# EAGLE board mano_rev_1_0 (EAGLE 9.2.2)
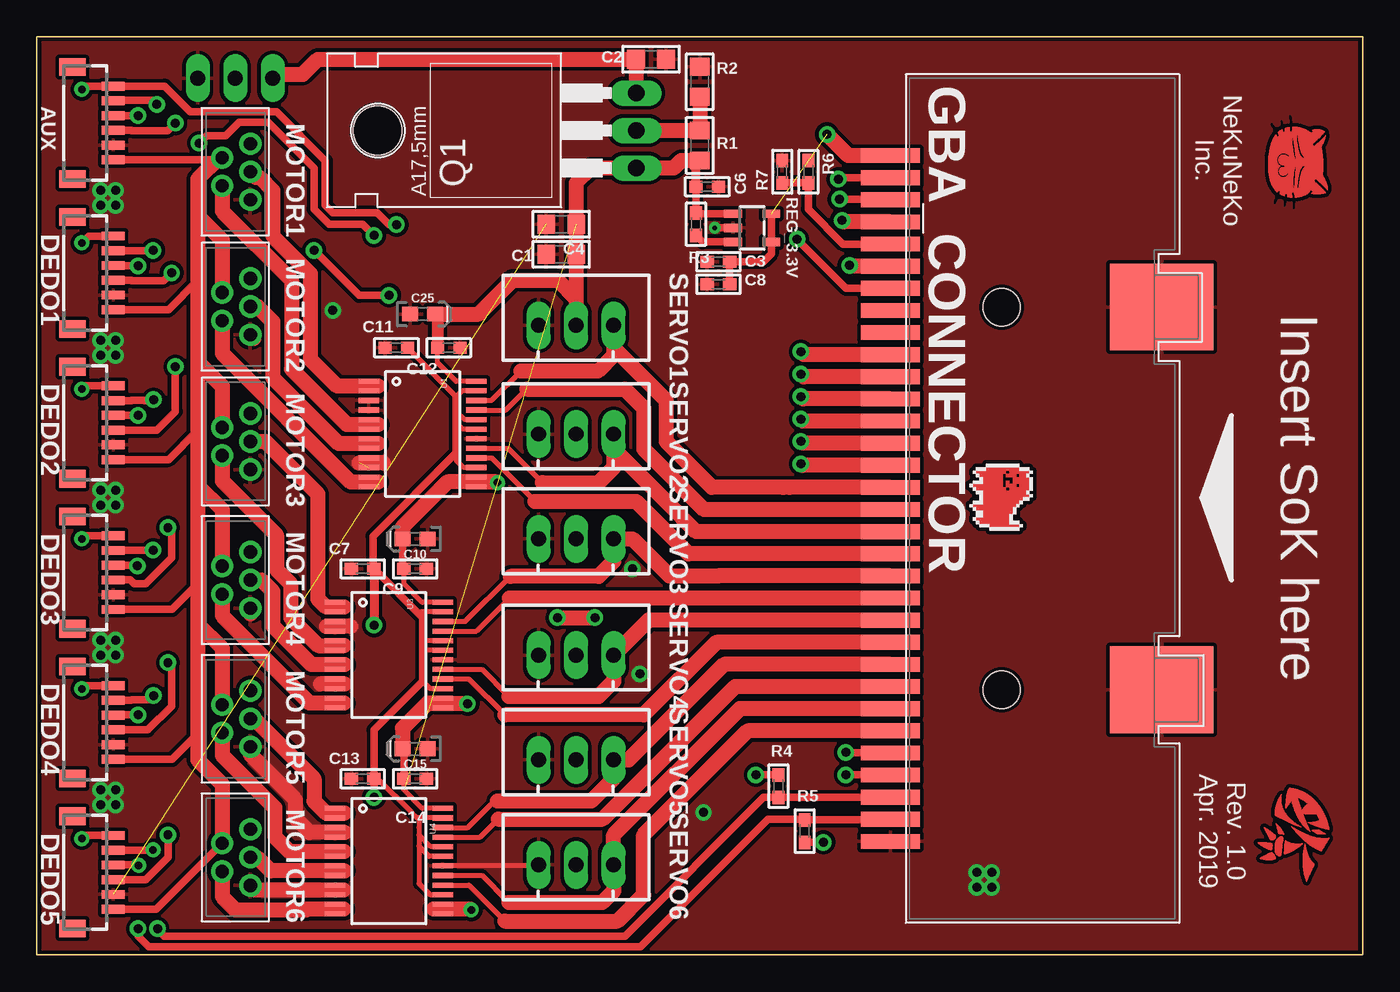
[diagram p0: board, top side]
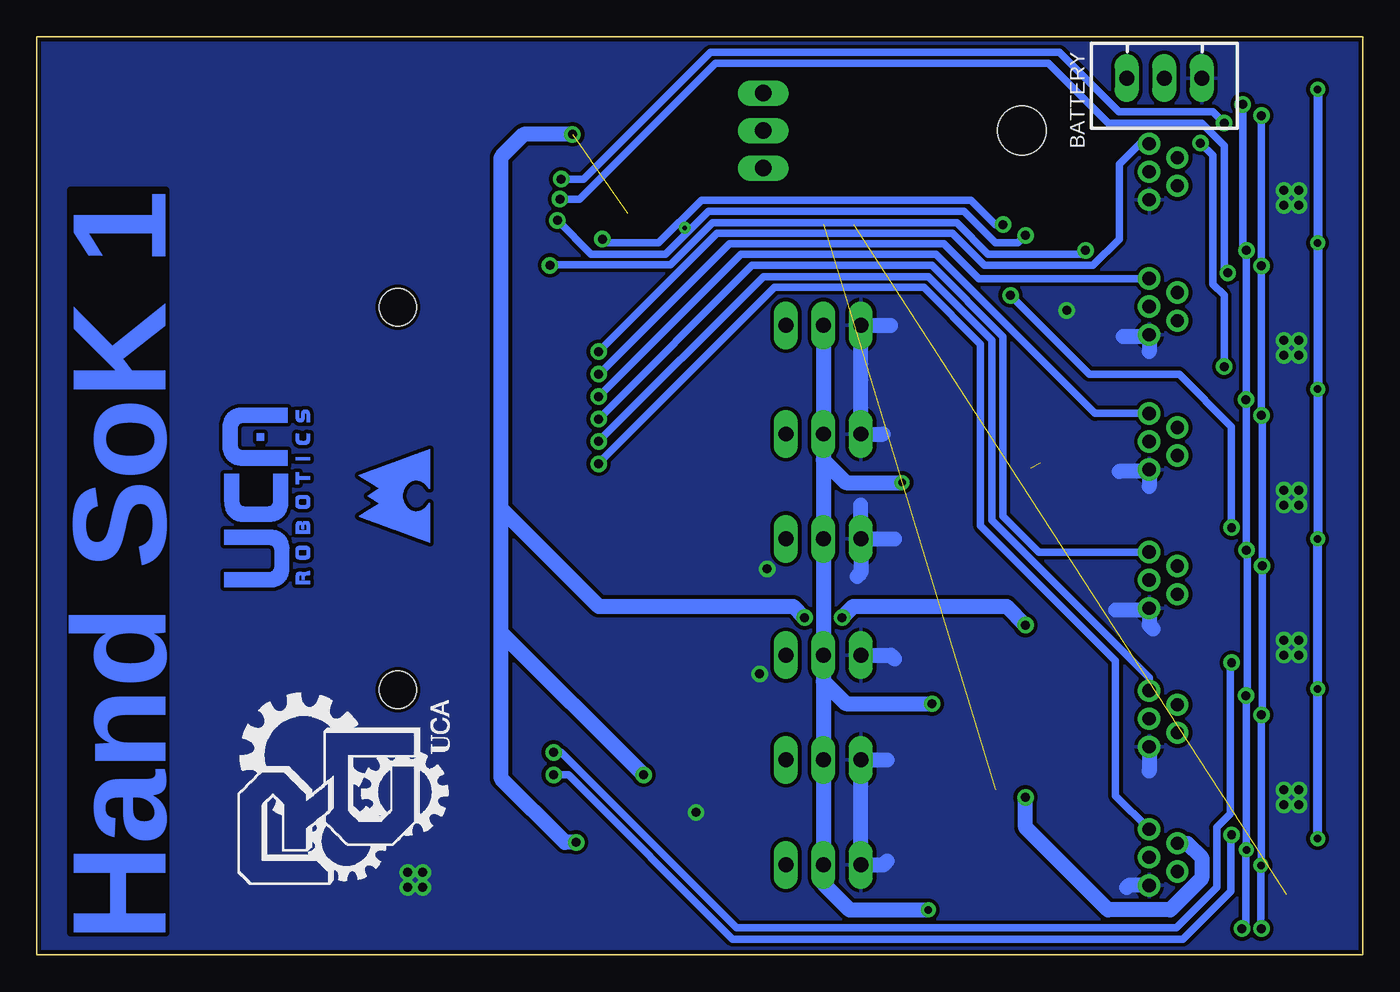
[diagram p1: board, bottom side, seen from below]

Size 89.92 x 62.23 mm. Coordinates in mm from the lower left corner, seen from the top.
Outline: 10.41,0 89.92,0 89.92,62.23 0,62.23 0,0 10.41,0
Copper layers (1*16): Top 0.035mm / dielectric 1.5mm / Bottom 0.035mm
Design rules "SparkFun": minimum track width 8mil, minimum drill 20mil, track to track 8mil, track to pad 8mil, pad to pad 8mil, via to via 8mil, smd to smd 8mil, copper to edge 10mil, drill to drill 8mil, minimum pad ring 12mil, minimum via ring 10mil, stop-mask expansion 4mil, vias tented up to drill 25mil, thermal gap 10mil
Net classes: 2 gnd: width 0.254 mm, drill 0.61 mm, clearance 0.254 mm

## Footprints (pad centres in the part's own frame; a part is rotated, then mirrored left to right if it is on the bottom)
BM06B-SRSS-TB = smd 0.6 x 1.55: 1 -2.5,-1.875; 2 -1.5,-1.875; 3 -0.5,-1.875; 4 0.5,-1.875; 5 1.5,-1.875; 6 2.5,-1.875 | smd 1.2 x 1.8: FIT@1 3.8,0.9; FIT@2 -3.8,0.9
JST-XH-03-PACKAGE-LONG-PAD = drill 1.016 long: 1 -2.54,0; 2 0,0; 3 2.54,0
_0805 = smd 1.2 x 1.3: 1 -1.016,0; 2 1.016,0
_0603 = smd 0.9 x 0.8: 1 -0.762,0; 2 0.762,0
0603-POLAR = smd 1.1 x 1: + 0.85,0; - -0.85,0
GBA_CARTRIDGE = smd 1 x 4: P$1 5.25,-1.3; P$2 6.75,-1.3; P$3 8.25,-1.3; P$4 9.75,-1.3; P$5 11.25,-1.3; P$6 12.75,-1.3; P$7 14.25,-1.3; P$8 15.75,-1.3; P$9 17.25,-1.3; P$10 18.75,-1.3; P$11 20.25,-1.3; P$12 21.75,-1.3; P$13 23.25,-1.3; P$14 24.75,-1.3; P$15 26.25,-1.3; P$16 27.75,-1.3; P$17 29.25,-1.3; P$18 30.75,-1.3; P$19 32.25,-1.3; P$20 33.75,-1.3; P$21 35.25,-1.3; P$22 36.75,-1.3; P$23 38.25,-1.3; P$24 39.75,-1.3; P$25 41.25,-1.3; P$26 42.75,-1.3; P$27 44.25,-1.3; P$28 45.75,-1.3; P$29 47.25,-1.3; P$30 48.75,-1.3; P$31 50.25,-1.3; P$32 51.75,-1.3 | smd 5.88 x 7: P$33 15.525,17.1; P$34 41.475,17.1 | hole 2.54: 15.525,6.25; 41.475,6.25
5PIN = drill 0.9: 1 -1.905,0; 2 -0.953,1.905; 3 0,0; 4 0.953,1.905; 5 1.905,0
TO220 = drill 1.118 long: 1 -2.54,-6.35; 2 0,-6.35; 3 2.54,-6.35 | hole 3.302: 0,11.176
SOT23-5 = smd 0.55 x 1.2: 1 -0.95,-1.3; 2 0,-1.3; 3 0.95,-1.3; 4 0.95,1.3; 5 -0.95,1.3
SSOP24 = smd 0.348 x 1.397: 1 -3.575,-3.656; 2 -2.925,-3.656; 3 -2.275,-3.656; 4 -1.625,-3.656; 5 -0.975,-3.656; 6 -0.325,-3.656; 7 0.325,-3.656; 8 0.975,-3.656; 9 1.625,-3.656; 10 2.275,-3.656; 11 2.925,-3.656; 12 3.575,-3.656; 13 3.575,3.656; 14 2.925,3.656; 15 2.275,3.656; 16 1.625,3.656; 17 0.975,3.656; 18 0.325,3.656; 19 -0.325,3.656; 20 -0.975,3.656; 21 -1.625,3.656; 22 -2.275,3.656; 23 -2.925,3.656; 24 -3.575,3.656

## Placement (x,y rotation side)
AUX  FINGER_5  [BM06B-SRSS-TB]  3.3,56.39 90 top
BATTERY  JST-XH-03-PIN-LONG-PAD  [JST-XH-03-PACKAGE-LONG-PAD]  13.46,59.44 180 bottom
C1  10uF  [_0805]  35.56,47.5 180 top
C2  10uF  [_0805]  41.66,60.71 0 top
C3  1uF  [_0603]  46.23,46.99 180 top
C4  0.1uF  [_0805]  35.56,49.53 180 top
C6  10uF  [_0603]  45.47,52.07 0 top
C7  0.1uF  [_0603]  22.1,26.16 180 top
C8  10uF  [_0603]  46.23,45.47 180 top
C9  0.1uF  [_0603]  25.65,26.16 180 top
C10  10uF  [0603-POLAR]  25.65,28.19 180 top
C11  0.1uF  [_0603]  24.38,41.15 180 top
C12  0.1uF  [_0603]  27.94,41.15 180 top
C13  0.1uF  [_0603]  22.1,11.94 180 top
C14  0.1uF  [_0603]  25.65,11.94 180 top
C15  10uF  [0603-POLAR]  25.65,13.97 180 top
C25  10uF  [0603-POLAR]  26.16,43.43 0 top
DEDO1  FINGER_1  [BM06B-SRSS-TB]  3.3,46.23 90 top
DEDO2  FINGER_2  [BM06B-SRSS-TB]  3.3,36.07 90 top
DEDO3  FINGER_3  [BM06B-SRSS-TB]  3.3,25.91 90 top
DEDO4  FINGER_4  [BM06B-SRSS-TB]  3.3,15.75 90 top
DEDO5  FINGER_5  [BM06B-SRSS-TB]  3.3,5.59 90 top
GBA_CONNECTOR  [GBA_CARTRIDGE]  59.18,59.44 270 top
MOTOR1  MOTOR1  [5PIN]  14.48,53.09 90 top
MOTOR2  MOTOR2  [5PIN]  14.48,43.94 90 top
MOTOR3  MOTOR3  [5PIN]  14.48,34.8 90 top
MOTOR4  MOTOR4  [5PIN]  14.48,25.4 90 top
MOTOR5  MOTOR5  [5PIN]  14.48,16 90 top
MOTOR6  MOTOR6  [5PIN]  14.48,6.6 90 top
Q1  LM338T  [TO220]  34.29,55.88 90 top
R1  270  [_0805]  44.96,54.86 270 top
R2  820  [_0805]  44.96,59.18 270 top
R3  100k  [_0603]  44.7,49.53 270 top
R4  4.7k  [_0603]  50.29,11.43 270 top
R5  4.7k  [_0603]  52.07,8.38 90 top
R6  4.7k  [_0603]  52.32,53.09 270 top
R7  4.7k  [_0603]  50.55,53.09 90 top
REG_3.3V  AP2112-3.3  [SOT23-5]  48.51,49.28 270 top
SERVO1  JST-XH-03-PIN-LONG-PAD  [JST-XH-03-PACKAGE-LONG-PAD]  36.58,42.67 0 top
SERVO2  JST-XH-03-PIN-LONG-PAD  [JST-XH-03-PACKAGE-LONG-PAD]  36.58,35.31 0 top
SERVO3  JST-XH-03-PIN-LONG-PAD  [JST-XH-03-PACKAGE-LONG-PAD]  36.58,28.19 0 top
SERVO4  JST-XH-03-PIN-LONG-PAD  [JST-XH-03-PACKAGE-LONG-PAD]  36.58,20.32 0 top
SERVO5  JST-XH-03-PIN-LONG-PAD  [JST-XH-03-PACKAGE-LONG-PAD]  36.58,13.21 0 top
SERVO6  JST-XH-03-PIN-LONG-PAD  [JST-XH-03-PACKAGE-LONG-PAD]  36.58,6.1 0 top
U1  TB6621FNG  [SSOP24]  26.16,35.31 270 top
U3  TB6621FNG  [SSOP24]  23.88,20.32 270 top
U4  TB6621FNG  [SSOP24]  23.88,6.35 270 top
U$6  [DOG2]  63.25,33.27 270 top
U$7  [SOK_FINISH]  82.55,11.43 270 top
U$8  [NEKO_FINISH]  83.31,56.9 270 top
U$9  [MAGMA]  63.25,27.94 90 bottom
U$14  [UCAROBOTICS]  71.12,24.64 90 bottom
U$16  [GIRA]  61.72,4.57 90 bottom

## Library data of the parts
AUX DEDO1-DEDO5 = con-jst
BATTERY SERVO1-SERVO6 = JST XH Connectors v1-0
C1-C4 C6-C9 C11-C14 R1-R7 REG_3.3V = microbuilder
C10 C15 C25 = SparkFun-Capacitors; MPN: F981A106MMA; PROD_ID: CAP-13210
GBA_CONNECTOR MOTOR1-MOTOR6 Q1 = 0SoK
U1 U3 U4 = SparkFun
U$6-U$9 U$14 U$16 = 0Logos

## Nets
3.3V: AUX.1 C3.1 C7.1 C8.1 C11.1 C13.1 DEDO1.1 DEDO2.1 DEDO3.1 DEDO4.1 DEDO5.1 GBA_CONNECTOR.P$1 MOTOR1.4 MOTOR2.4 MOTOR3.4 MOTOR4.4 MOTOR5.4 MOTOR6.4 R4.1 R5.1 R6.1 REG_3.3V.4 REG_3.3V.5 U1.15 U1.19 U1.20 U1.23 U3.15 U3.19 U3.20 U3.23 U4.15 U4.19 U4.20 U4.23
5.0V: C1.1 C4.1 C6.1 C9.2 C10.+ C12.2 C14.2 C15.+ C25.+ Q1.1 R1.2 R3.1 REG_3.3V.1 SERVO1.2 SERVO2.2 SERVO3.2 SERVO4.2 SERVO5.2 SERVO6.2 U1.13 U1.14 U1.24 U3.13 U3.14 U3.24 U4.13 U4.14 U4.24
AUX_INT: AUX.3 GBA_CONNECTOR.P$2
EN: R3.2 REG_3.3V.3
FINGER_!RESET: AUX.6 DEDO1.6 DEDO2.6 DEDO3.6 DEDO4.6 DEDO5.6 GBA_CONNECTOR.P$7
FINGER_INT1: DEDO1.3 GBA_CONNECTOR.P$3
FINGER_INT2: DEDO2.3 GBA_CONNECTOR.P$4
FINGER_INT3: DEDO3.3 GBA_CONNECTOR.P$6
FINGER_INT4: DEDO4.3 GBA_CONNECTOR.P$28
FINGER_INT5: DEDO5.3 GBA_CONNECTOR.P$29
GND [gnd]: AUX.2 BATTERY.1 C1.2 C2.2 C3.2 C4.2 C6.2 C7.2 C8.2 C9.1 C10.- C11.2 C12.1 C13.2 C14.1 C15.- C25.- DEDO1.2 DEDO2.2 DEDO3.2 DEDO4.2 DEDO5.2 GBA_CONNECTOR.P$32 GBA_CONNECTOR.P$33 GBA_CONNECTOR.P$34 MOTOR1.1 MOTOR2.1 MOTOR3.1 MOTOR4.1 MOTOR5.1 MOTOR6.1 R2.1 R7.2 REG_3.3V.2 SERVO1.1 SERVO2.1 SERVO3.1 SERVO4.1 SERVO5.1 SERVO6.1 U1.3 U1.4 U1.9 U1.10 U1.18 U3.3 U3.4 U3.9 U3.10 U3.18 U4.3 U4.4 U4.9 U4.10 U4.18
MT1_POT: GBA_CONNECTOR.P$10 MOTOR1.5
MT1A: MOTOR1.2 U1.5 U1.6
MT1B: MOTOR1.3 U1.1 U1.2
MT2_POT: GBA_CONNECTOR.P$11 MOTOR2.5
MT2A: MOTOR2.2 U1.11 U1.12
MT2B: MOTOR2.3 U1.7 U1.8
MT3_POT: GBA_CONNECTOR.P$12 MOTOR3.5
MT3A: MOTOR3.2 U3.5 U3.6
MT3B: MOTOR3.3 U3.1 U3.2
MT4_POT: GBA_CONNECTOR.P$13 MOTOR4.5
MT4A: MOTOR4.2 U3.11 U3.12
MT4B: MOTOR4.3 U3.7 U3.8
MT5_POT: GBA_CONNECTOR.P$14 MOTOR5.5
MT5A: MOTOR5.2 U4.5 U4.6
MT5B: MOTOR5.3 U4.1 U4.2
MT6_POT: GBA_CONNECTOR.P$15 MOTOR6.5
MT6A: MOTOR6.2 U4.11 U4.12
MT6B: MOTOR6.3 U4.7 U4.8
N$1: Q1.2 R1.1 R2.2
PWM_MT1A: GBA_CONNECTOR.P$17 U1.21
PWM_MT1B_SERVO1: GBA_CONNECTOR.P$16 SERVO1.3 U1.22
PWM_MT2A_SERVO2: GBA_CONNECTOR.P$18 SERVO2.3 U1.17
PWM_MT2B: GBA_CONNECTOR.P$19 U1.16
PWM_MT3A: GBA_CONNECTOR.P$21 U3.21
PWM_MT3B_SERVO3: GBA_CONNECTOR.P$20 SERVO3.3 U3.22
PWM_MT4A_SERVO4: GBA_CONNECTOR.P$22 SERVO4.3 U3.17
PWM_MT4B: GBA_CONNECTOR.P$23 U3.16
PWM_MT5A: GBA_CONNECTOR.P$25 U4.21
PWM_MT5B_SERVO5: GBA_CONNECTOR.P$24 SERVO5.3 U4.22
PWM_MT6A_SERVO6: GBA_CONNECTOR.P$26 SERVO6.3 U4.17
PWM_MT6B: GBA_CONNECTOR.P$27 U4.16
SCL: AUX.4 DEDO1.4 DEDO2.4 DEDO3.4 DEDO4.4 DEDO5.4 GBA_CONNECTOR.P$31 R5.2
SDA: AUX.5 DEDO1.5 DEDO2.5 DEDO3.5 DEDO4.5 DEDO5.5 GBA_CONNECTOR.P$30 R4.2
SOK: GBA_CONNECTOR.P$5 R6.2 R7.1
VIN: BATTERY.3 C2.1 Q1.3

## Tracks (layer width: path | path; a pad name or v marks a point on that pad's centre or on a via)
3.3V  (via drill 0.61)  (2 unrouted)
  Top 0.35: U3.15 26.66,18.05 26.16,18.54 26.16,20.83 | 26.16,20.83 26.16,21.08 26.16,21.34 | 26.16,21.34 26.16,21.84 26.16,22.86 26.16,23.11 26.03,23.25 U3.23 | U3.20 26.2,21.3 26.16,21.34 | U3.19 26.34,20.64 26.16,20.83 | U1.15 28.95,33.03 28.45,33.53 28.45,36.07 | 28.45,36.07 28.45,36.83 | 28.45,36.83 28.45,37.85 | 28.45,37.85 C11.1 | U1.19 28.88,35.63 28.45,36.07 | U1.20 29,36.28 28.45,36.83 | U1.23 28.83,38.23 28.45,37.85 | C13.1 23.11,11.94 25.4,9.65 25.65,9.4 | 25.91,8.13 25.91,8.64 25.91,9.14 25.65,9.4 | 25.91,8.13 25.91,7.37 | 25.91,7.37 25.91,4.83 26.66,4.08 U4.15 | U4.19 26.6,6.67 25.91,7.37 | U4.20 26.71,7.33 25.91,8.13 | U4.23 25.78,9.28 25.65,9.4
  Top 0.508: MOTOR6.4 8.11,3.09 DEDO5.1 | DEDO2.1 8.93,33.57 10.92,35.56 | DEDO4.1 9.18,13.25 10.92,14.99 | DEDO3.1 9.18,23.41 10.92,25.15 | DEDO1.1 8.93,43.73 10.92,45.72 | AUX.1 12.42,53.89 MOTOR1.4 | 28.45,37.85 28.45,34.04 22.8,28.39 22.8,26.22 C7.1 26.16,22.86 | MOTOR5.4 12.57,18.41 | 26.16,23.11 26.16,18.54 22.86,15.24 C13.1 v22.86,10.67 | C8.1 C3.1 49.28,46.99 49.81,47.53 REG_3.3V.4 REG_3.3V.5 | R4.1 v48.77,12.19 | R5.1 v53.34,7.62
  Top 0.61: C7.1 v22.86,22.35
  Top 1.016: MOTOR1.4 12.38,54.04 10.92,52.58 10.92,50.1 | 10.92,50.1 10.92,49.59 10.92,45.72 10.92,45.21 10.92,40.2 | MOTOR2.4 12.57,48.45 10.92,50.1 | MOTOR3.4 12.57,38.54 10.92,40.2 | 10.92,31.81 10.92,35.56 10.92,40.2 | 10.92,31.81 10.92,30.8 10.92,25.15 10.92,22.42 | MOTOR4.4 12.57,30.16 10.92,31.81 | MOTOR5.4 12.57,20.77 10.92,22.42 | MOTOR6.4 12.57,11.56 10.92,13.21 10.92,14.99 10.92,22.42 | v35.31,22.86 v37.85,22.86 | GBA_CONNECTOR.P$1 55.03,54.19 v53.59,55.63
  Bottom 1.016: v48.77,12.19 58.42,21.84 | 58.42,21.84 58.42,30.23 | 58.42,30.23 58.42,54.1 56.9,55.63 v53.59,55.63 | v53.34,7.62 54.1,7.62 58.42,11.94 58.42,21.84 | v22.86,22.35 24.13,23.62 34.54,23.62 v35.31,22.86 | v37.85,22.86 38.61,23.62 51.82,23.62 58.42,30.23 | MOTOR6.4 11.87,7.56 10.92,6.6 10.92,5.17 13.05,3.05 17.27,3.05 22.86,8.64 v22.86,10.67
5.0V  (via drill 0.51, 0.61)  (1 unrouted)
  Top 0.35: U4.13 27.23,2.77 26.9,3.1 27.2,3.1 U4.14 | U3.13 27.21,17.07 26.75,17.07 | 26.75,17.07 26.5,17.07 | U3.14 27.2,17.07 26.75,17.07 | U4.24 26.14,9.93 24.89,11.18 C14.2 | U1.24 28.43,38.88 27.18,40.13 C12.2 | U3.24 26.14,23.89 24.89,25.15 C9.2 | U1.14 30.87,32.38 31.19,32.05 | U1.13 30.97,31.73 v31.24,32
  Top 0.508: C14.2 24.89,13.88 C15.+ | REG_3.3V.1 44.77,50.23 R3.1 C6.1 | C9.2 24.8,26.25 C10.+
  Top 0.61: R1.2 44.7,53.85 C6.1
  Top 0.813: C25.+ 27.18,43.43 C12.2
  Top 1.016: v29.46,3.05 29.41,3.1 26.9,3.1 | v29.21,17.02 29.16,17.07 26.75,17.07 | 26.5,17.07 24.8,15.37 C15.+ | C10.+ 24.8,29.01 27.85,32.05 31.19,32.05 v31.24,32 | R1.2 43.69,53.85 43.18,53.34 Q1.1 37.59,53.34 36.58,52.32 C1.1 SERVO1.2 36.58,44.45 35.31,45.72 32.26,45.72 29.97,43.43 C25.+
  Bottom 1.016: SERVO4.2 SERVO5.2 SERVO6.2 36.58,4.83 34.8,3.05 v29.46,3.05 | SERVO4.2 SERVO3.2 36.58,33.53 | 36.58,33.53 36.58,34.29 36.58,34.54 36.58,35.05 SERVO2.2 SERVO1.2 | SERVO4.2 36.58,18.54 35.05,17.02 v29.21,17.02 | 36.58,33.53 35.05,32 v31.24,32
AUX_INT  (via drill 0.61)
  Top 0.508: v9.4,56.39 v9.39,56.39 8.88,55.88 6.44,55.88 6.43,55.89 AUX.3 | v54.36,52.58 54.47,52.58 54.58,52.69 GBA_CONNECTOR.P$2
  Bottom 0.508: v9.4,56.39 10.16,57.15 16.53,57.15 20.56,61.18 44.23,61.18 52.83,52.58 v54.36,52.58
EN
  Top 0.508: REG_3.3V.3 45.15,48.33 R3.2
FINGER_!RESET  (via drill 0.51, 0.61)
  Top 0.508: DEDO5.6 3.26,8.09 v3.05,7.87 | v3.05,18.03 3.26,18.25 DEDO4.6 | v3.05,28.19 3.26,28.41 DEDO3.6 | v3.05,38.35 3.26,38.57 DEDO2.6 | v3.05,48.26 3.52,48.73 DEDO1.6 | v3.05,58.67 3.26,58.89 AUX.6 8.68,58.89 10.41,57.15 16.26,57.15 19.56,53.85 19.56,50.8 20.07,50.29 23.08,50.29 23.88,49.5 v24.38,49.5 | GBA_CONNECTOR.P$7 57.4,45.19 54.89,45.19 v51.56,48.51
  Bottom 0.508: v24.38,49.5 24.89,49.5 26.55,51.16 44.85,51.16 47.75,48.26 51.31,48.26 v51.56,48.51
  Bottom 0.61: v3.05,7.87 v3.05,18.03 v3.05,28.19 v3.05,38.35 v3.05,48.26 v3.05,58.67
FINGER_INT1  (via drill 0.61)
  Top 0.508: DEDO1.3 6.4,45.73 6.44,45.7 8.61,45.7 v9.14,46.23 | v54.44,51.23 57.84,51.23 GBA_CONNECTOR.P$3
  Bottom 0.508: v9.14,46.23 9.4,46.48 9.4,54.86 10.92,56.39 17.26,56.39 21.33,60.45 40.13,60.45 43.88,60.45 53.11,51.23 v54.44,51.23
FINGER_INT2  (via drill 0.61)
  Top 0.508: v22.86,48.77 22.1,49.53 19.81,49.53 18.8,50.55 18.8,53.34 15.7,56.44 13.72,56.44 12.82,55.54 11.51,55.54 v11,55.03 | DEDO2.3 6.43,35.57 6.44,35.56 8.13,35.56 9.4,36.83 v9.4,39.88
  Top 1.016: GBA_CONNECTOR.P$4 54.71,49.69 v54.61,49.78
  Bottom 0.508: v54.61,49.78 52.32,47.5 47.28,47.5 44.38,50.41 27.04,50.41 24.89,48.26 23.37,48.26 v22.86,48.77 | v9.4,39.88 9.4,44.7 10.16,45.47 10.16,54.19 v11,55.03
FINGER_INT3  (via drill 0.61)
  Top 0.508: DEDO3.3 6.34,25.41 6.39,25.36 6.6,25.15 7.37,25.15 9.14,26.92 9.14,28.7 v8.89,28.96 | v23.88,44.7 21.84,44.7 v18.8,47.75
  Top 1.016: GBA_CONNECTOR.P$6 55.17,46.69 v55.12,46.74
  Bottom 0.508: v8.89,28.96 8.89,35.81 12.45,39.37 18.54,39.37 v23.88,44.7 | v18.8,47.75 19.05,47.5 25.4,47.5 27.53,49.63 44.11,49.63 46.95,46.79 55.07,46.79 v55.12,46.74
FINGER_INT4  (via drill 0.61)
  Top 0.508: GBA_CONNECTOR.P$28 54.89,13.69 v54.86,13.72 | v8.89,19.81 9.14,19.56 9.14,16.85 7.53,15.24 6.44,15.24 6.43,15.25 DEDO4.3
  Bottom 0.508: v54.86,13.72 54.36,13.72 42.47,1.83 12.65,1.83 9.91,4.57 9.91,8.64 8.97,9.57 8.97,19.73 v8.89,19.81
FINGER_INT5  (via drill 0.61)
  Top 0.508: DEDO5.3 7.37,5.09 8.89,6.6 v8.89,8.13 | v54.86,12.19 GBA_CONNECTOR.P$29
  Bottom 0.508: v8.89,8.13 8.94,8.08 8.94,4.32 12.2,1.07 42.72,1.07 53.85,12.19 v54.86,12.19
GND  (via drill 0.3, 0.61)  (2 unrouted)
  Top 0.35: U4.3 20.57,8.62 20.89,8.3 20.57,7.97 U4.4 | SERVO6.1 33.96,6.03 U4.18 | U3.9 20.55,18.7 20.89,18.36 20.53,18.36 U3.10
  Top 0.508: REG_3.3V.2 v45.97,49.28
  Top 1.016: MOTOR5.1 14.48,13.59 17.53,10.54 17.53,9.27 18.49,8.3 20.89,8.3 | 20.84,4.39 14.79,4.39 MOTOR6.1 | MOTOR4.1 14.48,23.11 | 20.89,18.36 19.23,18.36 | MOTOR2.1 14.73,41.78 | 21.29,22.27 19.63,22.27 | 23.5,33.35 21.85,33.35
  Bottom 1.016: MOTOR6.1 15.88,4.7 16,4.57 | MOTOR5.1 14.48,12.45 | 14.22,22.1 14.48,22.35 MOTOR4.1 14.61,23.37 16.76,23.37 | 14.48,31.75 MOTOR3.1 14.61,32.77 16.51,32.77 | 14.48,40.89 MOTOR2.1 14.61,41.91 16.26,41.91 | SERVO4.1 32,20.32 31.75,20.07 | 32.26,13.21 SERVO5.1 SERVO6.1 32.51,6.1 32.26,6.35 | SERVO3.1 34.04,25.91 34.29,25.65 | SERVO3.1 31.75,28.19 | SERVO3.1 34.04,30.48 | 32.51,35.31 SERVO2.1 SERVO1.1 32,42.67
  other vias: 45.21,9.65 40.89,19.05 40.39,26.16 63.75,4.57 64.77,5.59 64.77,4.57 63.75,5.59 4.32,10.16 5.33,11.18 5.33,10.16 4.32,11.18 4.32,20.32 5.33,20.32 5.33,21.34 4.32,21.34 4.32,30.48 5.33,30.48 5.33,31.5 4.32,31.5 4.32,41.66 4.32,40.64 5.33,40.64 5.33,41.66 4.32,51.82 4.32,50.8 5.33,50.8 5.33,51.82 20.07,43.69
  pour Bottom (isolate 0.012): 0,0 89.92,0 89.92,62.23 0,62.23
  pour Top: 0,0 89.92,0 89.92,62.23 0,62.23
MT1_POT  (via drill 0.61)
  Top 1.016: GBA_CONNECTOR.P$10 52.02,40.69 v51.82,40.89
  Bottom 0.508: MOTOR1.5 15.11,54.99 16.51,53.59 16.51,48.51 18.29,46.74 25.65,46.74 27.84,48.92 43.79,48.92 v51.82,40.89
MT1A
  Top 0.35: U1.6 22.85,35.63 23.17,35.95 22.84,36.28 U1.5
  Top 1.016: MOTOR1.2 12.57,50.42 17.27,45.72 17.27,39.71 21.03,35.95 23.17,35.95
MT1B
  Top 0.35: U1.2 22.82,38.55 23.15,38.55 22.82,38.88 U1.1
  Top 1.016: MOTOR1.3 14.87,52.7 15.11,52.7 16,51.8 16,48.71 18.54,46.17 18.54,40.39 20.38,38.55 23.15,38.55
MT2_POT  (via drill 0.61)
  Top 1.016: GBA_CONNECTOR.P$11 52,39.19 v51.82,39.37
  Bottom 0.508: MOTOR2.5 26.04,45.85 28.4,48.21 42.93,48.21 51.51,39.62 51.56,39.62 v51.82,39.37
MT2A
  Top 0.35: U1.12 22.82,32.05 23.15,32.05 22.84,32.05 U1.11
  Top 1.016: MOTOR2.2 12.57,40.77 21.29,32.05 23.15,32.05
MT2B
  Top 0.35: U1.8 22.84,34.33 23.16,34.65 22.83,34.98 U1.7
  Top 1.016: MOTOR2.3 14.99,43.94 16,42.93 16,39.12 20.47,34.65 23.16,34.65
MT3_POT  (via drill 0.61)
  Top 1.016: GBA_CONNECTOR.P$12 51.98,37.69 v51.82,37.85
  Bottom 0.508: MOTOR3.5 18.16,36.7 28.96,47.5 42.16,47.5 v51.82,37.85
MT3A
  Top 0.35: U3.6 20.54,20.64 20.85,20.96 20.52,21.3 U3.5
  Top 1.016: MOTOR3.2 12.57,32.13 16.26,28.45 16.26,26.11 17.22,25.14 17.22,22.82 19.09,20.96 20.85,20.96
MT3B
  Top 0.35: U3.1 20.52,23.89 20.86,23.56 20.54,23.56 U3.2
  Top 1.016: MOTOR3.3 15.49,34.8 19.05,31.24 19.05,24.13 19.62,23.56 20.86,23.56
MT4_POT  (via drill 0.61)
  Top 1.016: GBA_CONNECTOR.P$13 51.95,36.19 v51.82,36.32
  Bottom 0.508: MOTOR4.5 21.97,27.3 24.38,29.72 24.38,41.91 29.21,46.74 41.4,46.74 v51.82,36.32
MT4A
  Top 0.35: U3.11 20.55,17.07 20.86,17.07 20.54,16.75 U3.12
  Top 1.016: MOTOR4.2 12.57,22.99 18.49,17.07 20.86,17.07
MT4B
  Top 0.35: U3.8 20.57,19.34 20.89,19.67 20.57,20 U3.7
  Top 1.016: MOTOR4.3 15.24,25.4 16,24.64 16,22.29 18.62,19.67 20.89,19.67
MT5_POT  (via drill 0.61)
  Top 1.016: GBA_CONNECTOR.P$14 51.93,34.69 v51.82,34.8
  Bottom 0.508: MOTOR5.5 14.48,18.8 25.15,29.46 25.15,41.66 29.46,45.97 40.64,45.97 v51.82,34.8
MT5A
  Top 0.35: U4.6 20.54,6.67 20.86,6.99 20.52,7.33 U4.5
  Top 1.016: MOTOR5.2 12.57,13.53 16.13,9.97 16.13,8 17.14,6.99 20.86,6.99
MT5B
  Top 0.35: U4.2 20.55,9.28 20.87,9.6 20.55,9.93 U4.1
  Top 1.016: 20.87,9.6 19.61,9.6 18.8,10.41 18.8,11.94 14.73,16 MOTOR5.3
MT6_POT  (via drill 0.61)
  Top 1.016: GBA_CONNECTOR.P$15 51.9,33.19 v51.82,33.27
  Bottom 0.508: MOTOR6.5 16.76,10.79 16.76,19.94 25.91,29.08 25.91,41.4 29.77,45.26 39.88,45.26 51.82,33.33 v51.82,33.27
MT6A
  Top 0.35: U4.12 20.53,3.09 20.83,3.09 20.56,3.09 U4.11
  Top 1.016: MOTOR6.2 12.57,3.94 13.46,3.05 18.29,3.05 18.33,3.09 20.83,3.09
MT6B
  Top 0.35: U4.7 20.54,6.03 20.88,5.69 20.56,5.38 U4.8
  Top 1.016: MOTOR6.3 14.94,6.6 15.85,5.69 20.88,5.69
N$1
  Top 1.016: Q1.2 R1.1 R2.2
PWM_MT1A
  Top 0.35: 33.22,38.35 31.8,36.93 U1.21
  Top 1.016: 33.22,38.35 39.88,38.35 41.15,37.08 41.15,34.29 45.25,30.19 GBA_CONNECTOR.P$17
PWM_MT1B_SERVO1
  Top 0.35: 32.83,39.57 30.83,37.58 U1.22
  Top 1.016: GBA_CONNECTOR.P$16 51.05,31.69 | 51.05,31.69 50.61,31.69 | 32.83,39.57 38.05,39.57 39.12,40.64 SERVO1.3 39.12,41.15 42.67,37.59 42.67,34.8 45.78,31.69 51.05,31.69
PWM_MT2A_SERVO2
  Top 0.35: 34.29,32 31.96,34.33 U1.17
  Top 1.016: 39.12,34.8 SERVO2.3 | SERVO2.3 39.12,33.02 38.1,32 34.29,32 | SERVO2.3 39.12,34.29 42.67,30.73 44.72,28.69 GBA_CONNECTOR.P$18
PWM_MT2B
  Top 0.35: 33.78,30.73 30.84,33.68 U1.16
  Top 1.016: 33.78,30.73 40.64,30.73 44.19,27.19 GBA_CONNECTOR.P$19
PWM_MT3A
  Top 0.35: 32.06,24.19 29.82,21.95 U3.21
  Top 1.016: GBA_CONNECTOR.P$21 32.06,24.19
PWM_MT3B_SERVO3
  Top 0.35: 32.12,25.65 29.06,22.59 U3.22
  Top 1.016: GBA_CONNECTOR.P$20 46.2,25.69 42.89,25.69 40.39,28.19 SERVO3.3 39.12,26.67 38.1,25.65 32.12,25.65
PWM_MT4A_SERVO4
  Top 0.35: 32,17.53 30.19,19.34 U3.17
  Top 1.016: GBA_CONNECTOR.P$22 41.48,22.69 SERVO4.3 39.12,18.54 38.1,17.53 32,17.53
PWM_MT4B
  Top 0.35: 31.75,16.26 29.31,18.7 U3.16
  Top 1.016: GBA_CONNECTOR.P$23 46.08,21.19 41.15,16.26 31.75,16.26
PWM_MT5A
  Top 0.35: 31.29,9.19 30.07,7.97 U4.21
  Top 1.016: 31.29,9.19 38.35,9.19 47.35,18.19 GBA_CONNECTOR.P$25
PWM_MT5B_SERVO5
  Top 0.35: U4.22 29.22,8.62 31.01,10.41 31.24,10.41
  Top 1.016: GBA_CONNECTOR.P$24 46.61,19.69 40.13,13.21 SERVO5.3 39.12,11.94 37.59,10.41 31.24,10.41
PWM_MT6A_SERVO6
  Top 0.35: 32,3.56 30.19,5.38 U4.17
  Top 1.016: SERVO6.3 39.12,6.6 | SERVO6.3 39.12,4.32 38.35,3.56 32,3.56 | SERVO6.3 39.12,8.13 47.67,16.69 GBA_CONNECTOR.P$26
PWM_MT6B
  Top 0.35: U4.16 29.31,4.72 31.75,2.29
  Top 1.016: 31.75,2.29 39.37,2.29 41.15,4.06 41.15,8.13 44.2,11.18 48.21,15.19 GBA_CONNECTOR.P$27
SCL  (via drill 0.51, 0.61)
  Top 0.508: DEDO5.4 6.87,6.09 v6.9,6.05 | DEDO4.4 v6.86,16.26 | DEDO3.4 6.78,26.41 v6.81,26.37 | DEDO2.4 6.85,36.57 v6.86,36.58 | DEDO1.4 6.84,46.73 v6.86,46.71 | AUX.4 6.85,56.89 v6.86,56.9 | v6.86,1.78 6.86,1.27 7.57,0.56 40.95,0.56 49.57,9.19 52.03,9.19 R5.2 57.84,9.14 GBA_CONNECTOR.P$31
  Bottom 0.508: v6.86,1.78 6.9,1.82 v6.9,6.05 | v6.91,6.06 v6.9,6.05 | v6.9,6.05 6.86,6.1 v6.86,16.26 6.91,16.2 6.81,16.3 v6.81,26.37 6.81,36.53 v6.86,36.58 v6.86,46.71 v6.86,56.9
SDA  (via drill 0.51, 0.61)
  Top 0.508: DEDO5.5 7.85,7.09 v7.87,7.11 | v8.18,1.78 8.18,1.73 8.64,1.27 39.88,1.27 49.29,10.69 50.27,10.69 R4.2 57.86,10.67 GBA_CONNECTOR.P$30 | v7.92,17.57 7.62,17.27 6.44,17.27 6.41,17.25 DEDO4.5 | DEDO3.5 7.85,27.41 v7.87,27.43 | v7.92,37.64 7.85,37.57 7.3,37.57 7.28,37.59 6.44,37.59 6.41,37.57 DEDO2.5 | DEDO1.5 7.85,47.73 v7.87,47.75 | AUX.5 5.22,57.93 7.87,57.93 7.87,57.91 v8.13,57.66
  Bottom 0.508: v8.18,1.78 7.92,2.03 7.92,7.06 v7.87,7.11 7.87,15.49 7.87,17.53 v7.92,17.57 7.83,17.57 7.83,27.39 v7.87,27.43 7.87,35.9 7.87,37 7.87,37.59 v7.92,37.64 7.87,37.68 v7.87,47.75 8.13,48.01 v8.13,57.66
SOK
  Top 0.508: GBA_CONNECTOR.P$5 54.68,48.19 52.32,50.55 R6.2 51.82,52.32 R7.1
VIN
  Top 1.016: Q1.3 C2.1 19.05,60.71 18.03,59.69 16.26,59.69 BATTERY.3

## Text on the board
Bottom: Hand SoK 1
tPlace: NeKuNeKo / Inc. | Insert SoK here | Rev. 1.0 / Apr. 2019
tStop: Hand SoK 1